# Altium PCB PIR Sensor driver v5-Cheburan.PcbDoc
Units mm, origin at the board's own origin, x right, y up, seen from the top; angles counter-clockwise.
Board outline 43.5 x 31 mm, 2 copper layers (Top Layer, Bottom Layer); 18 components, 11 nets, 45 pads, 0 vias.
Unrouted connection lines stored in the file: 2.
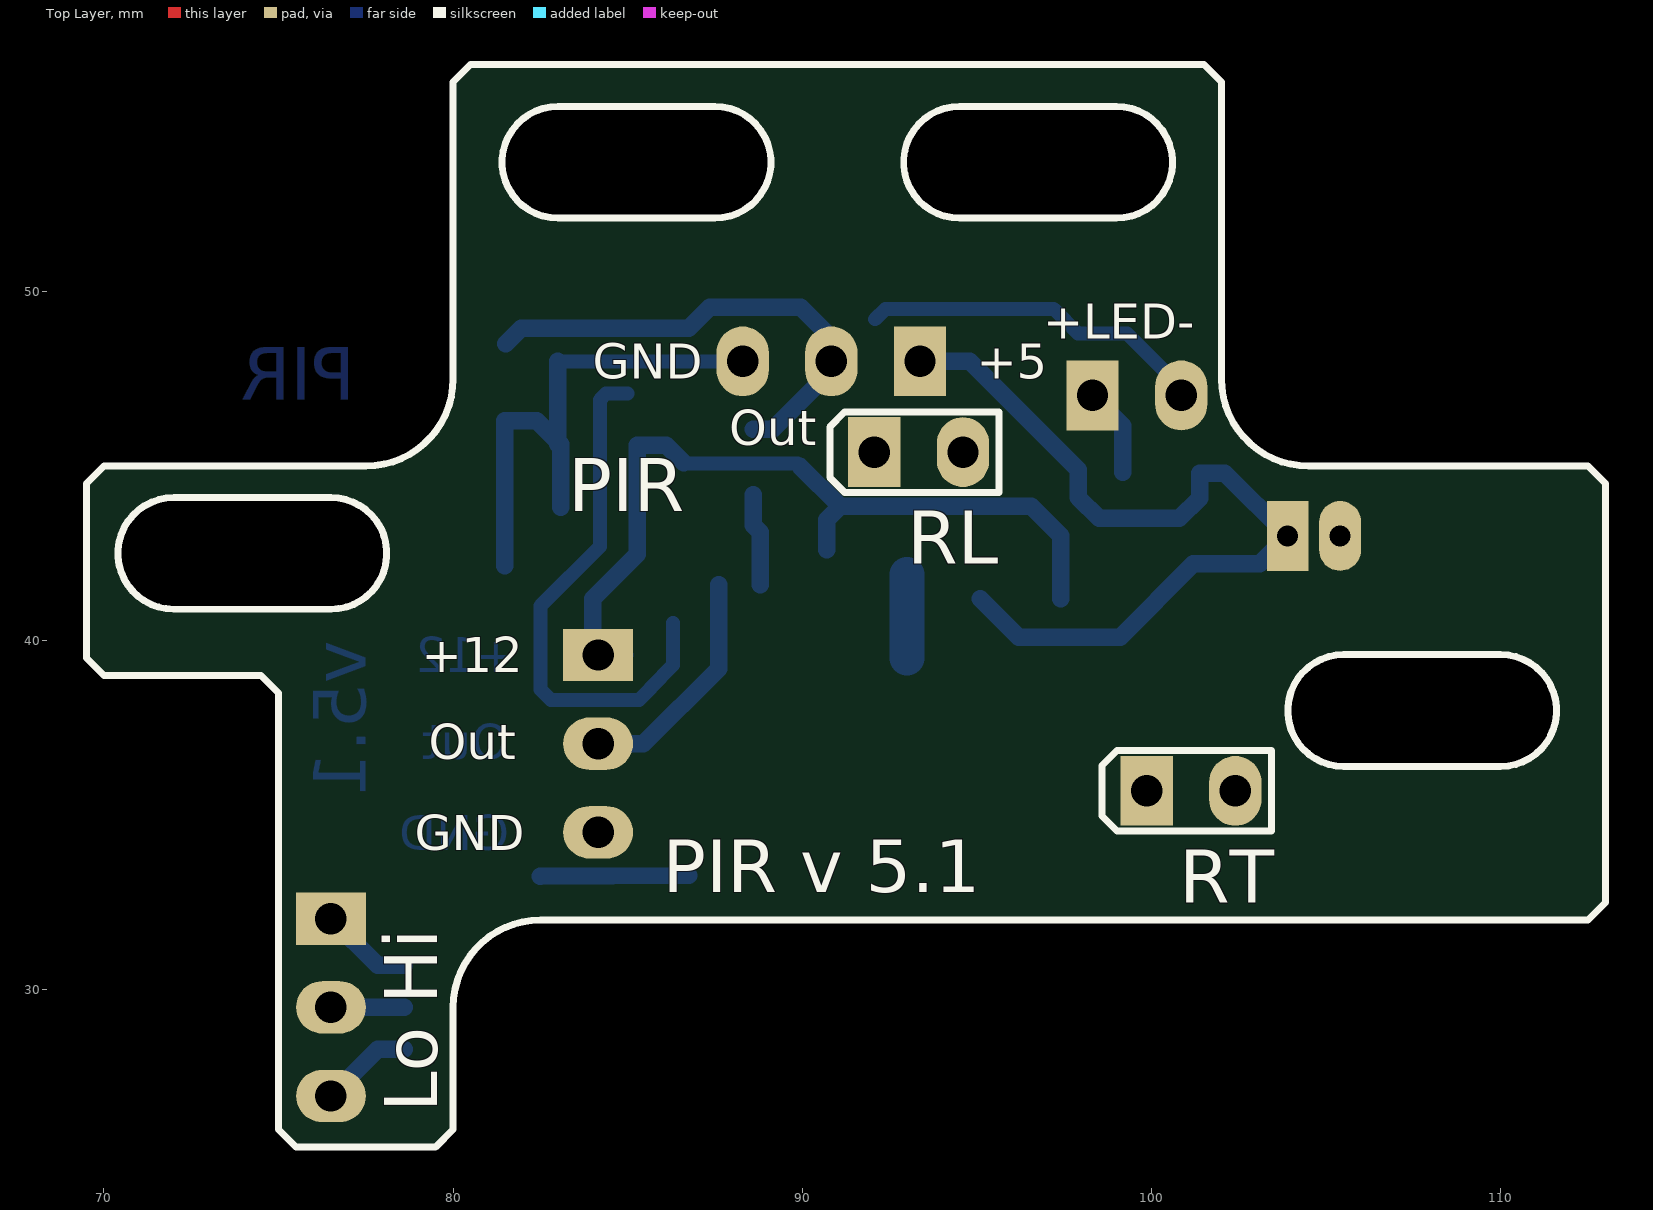
[diagram p0: Top Layer view]
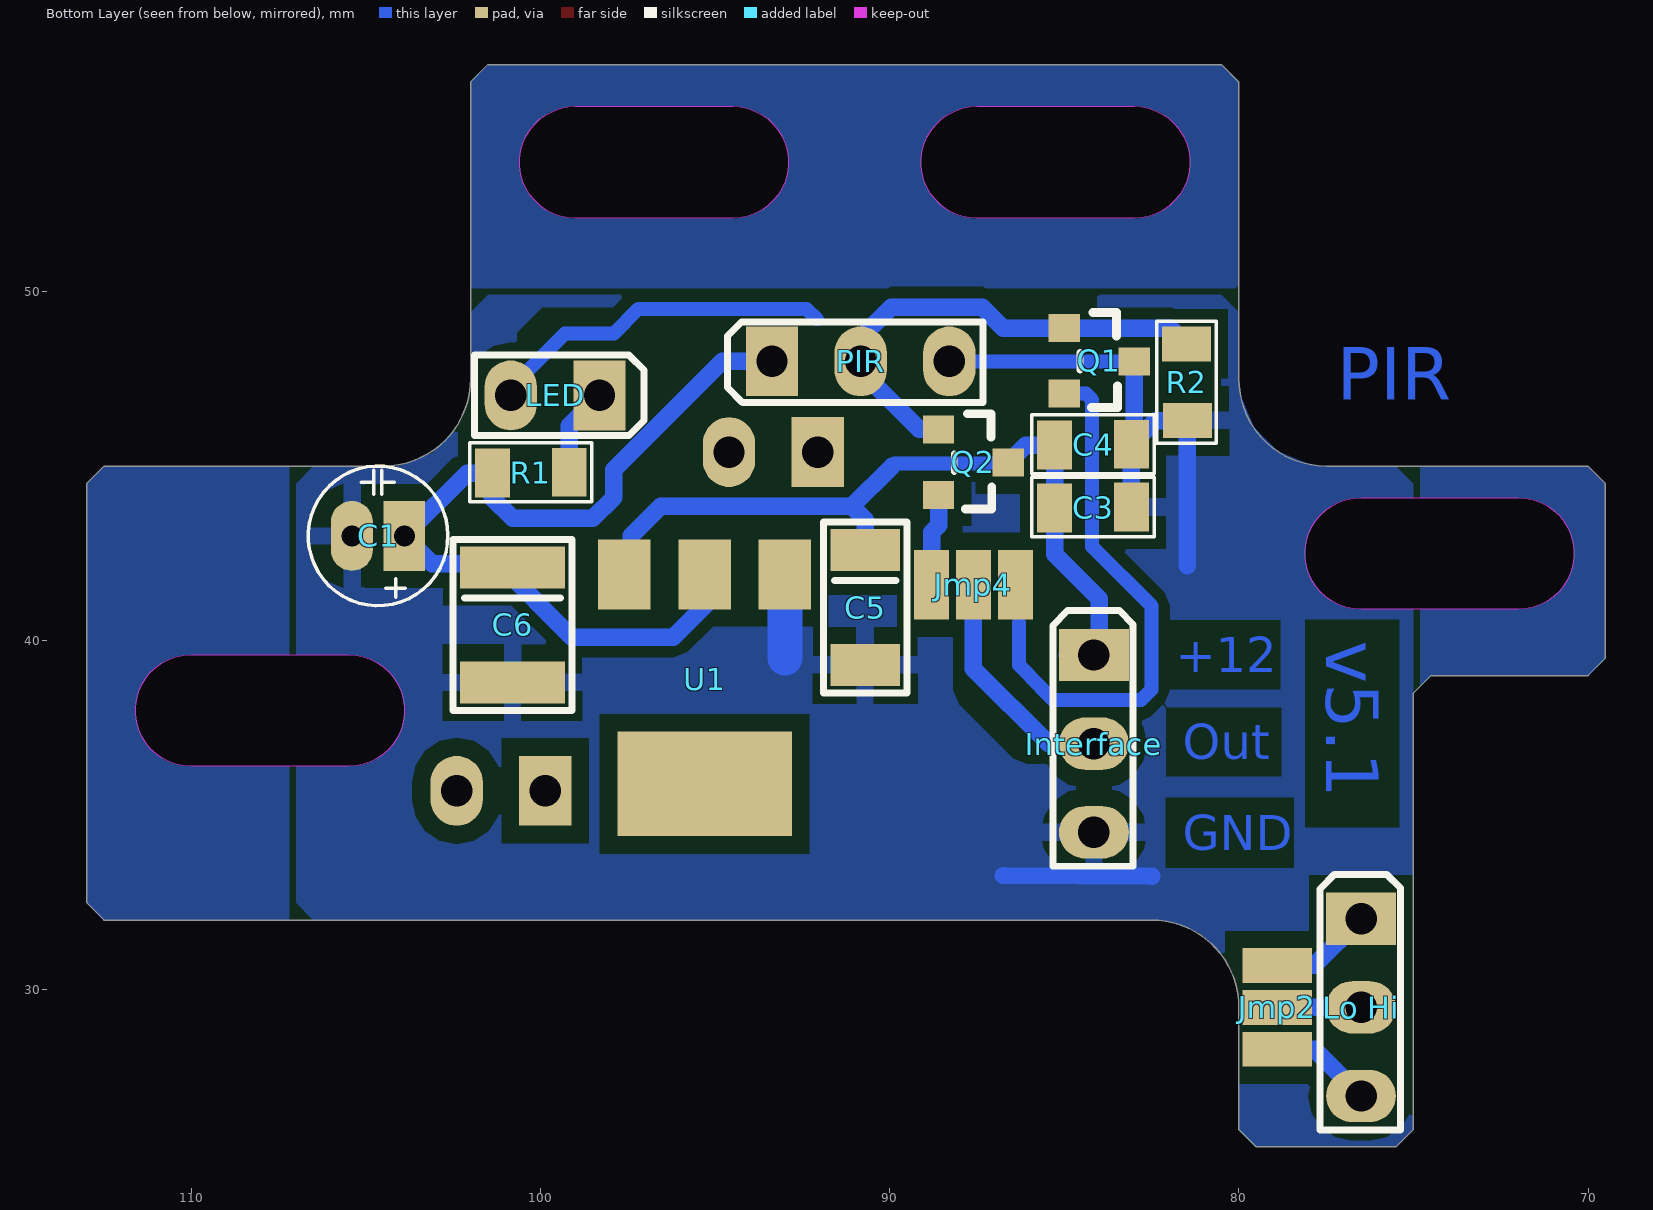
[diagram p1: Bottom Layer view, seen from below]
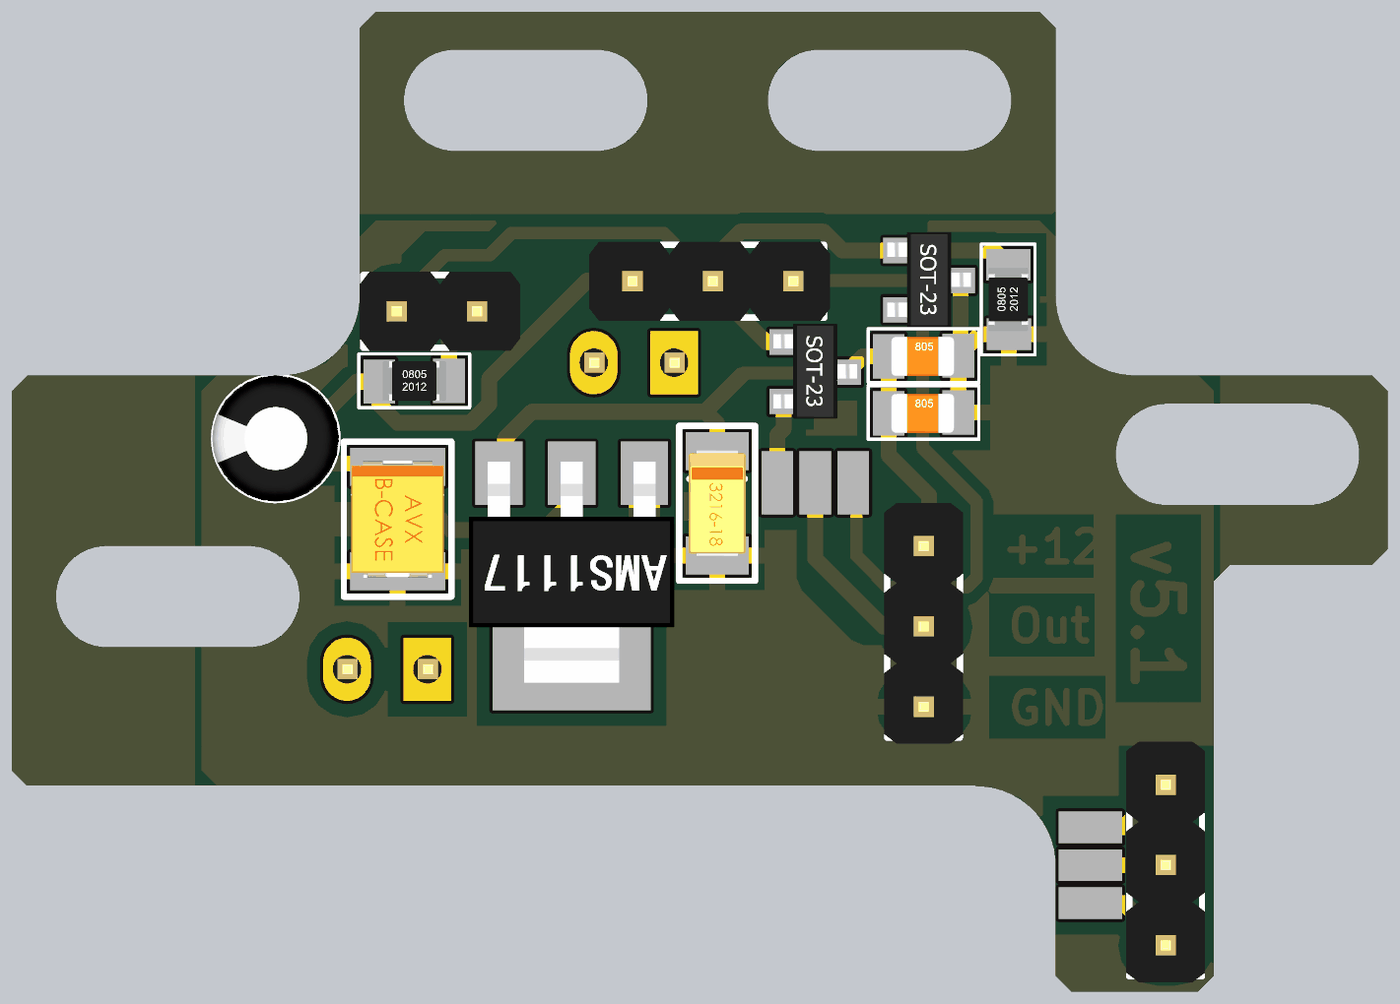
[diagram p2: 3D render of the assembled board from below, using the file's embedded part models]

## Layer stack, top to bottom
Top Solder: solder mask 0.0102, Solder Resist, Dk 3.5
Top Layer: signal copper 0.0356
Dielectric 1: dielectric 0.32, FR-4, Dk 4.8
Bottom Layer: signal copper 0.0356
Bottom Solder: solder mask 0.0102, Solder Resist, Dk 3.5

## Board outline
75,26 75,38.5 74.5,39 70,39 69.5,39.5 69.5,44.5 70,45 77.5,45 ccw(c77.5,47.5) 80,47.5 80,56 80.5,56.5 101.5,56.5 102,56 102,47.5 ccw(c104.5,47.5) 104.5,45 112.5,45 113,44.5 113,32.5 112.5,32 82.5,32 ccw(c82.5,29.5) 80,29.5 80,26 79.5,25.5 75.5,25.5
cut-out: 83,52.1 87.5,52.1 ccw(c87.5,53.7) 87.5,55.3 83,55.3 ccw(c83,53.7)
cut-out: 94.5,52.1 99,52.1 ccw(c99,53.7) 99,55.3 94.5,55.3 ccw(c94.5,53.7)
cut-out: 105.5,36.4 110,36.4 ccw(c110,38) 110,39.6 105.5,39.6 ccw(c105.5,38)
cut-out: 72,40.9 76.5,40.9 ccw(c76.5,42.5) 76.5,44.1 72,44.1 ccw(c72,42.5)

## Design rules (kind name [scope] priority, off if disabled: settings)
Clearance "Poly To All" [InPolygon vs (InPadClass('All Pads'))] p1: gap=0.5 ignorepadtopadclearanceinfootprint=FALSE except(0: Arc-Hole Track-Hole SMDPad-Hole THPad-Hole Via-Hole Fill-Hole Poly-Hole Region-Hole Text-Hole)
Clearance Jumpers [InComponent('Jmp*') vs InComponent('Jmp*')] p2: gap=0.2 ignorepadtopadclearanceinfootprint=FALSE except(0: Arc-Hole Track-Hole SMDPad-Hole THPad-Hole Via-Hole Fill-Hole Poly-Hole Region-Hole Text-Hole)
Clearance "Poly to cutout" [InPolygon vs IsRegion] p3: gap=0 ignorepadtopadclearanceinfootprint=FALSE
Clearance [All] p4: gap=0.3 ignorepadtopadclearanceinfootprint=FALSE except(0: Arc-Hole Track-Hole SMDPad-Hole THPad-Hole Via-Hole Fill-Hole Poly-Hole Region-Hole Text-Hole)
ComponentClearance [All] p1: gap=0.01 collisioncheckmode=3 verticalgap=0.2 showdistances=FALSE
Height [All] p1: minheight=0 maxheight=25 prefheight=12.7
HoleSize [All] p1: absolutevalues=TRUE maxlimit=3.2 minlimit=0.4 maxpercent=80.000 minpercent=20.000
HoleToHoleClearance [All] p1: gap=0.2 allowstackedmicrovias=TRUE
PlaneClearance [All] p1: clearance=0.5
PlaneConnect [All] p1: planeconnectstyle=Relief reliefexpansion=0.508 reliefentries=4 reliefconductorwidth=0.5 reliefairgap=0.5
PolygonConnect [All] p1: connectstyle=Relief reliefconductorwidth=0.5 reliefentries=4 polygonreliefangle="90 Angle" airgapwidth=0.5
RoutingVias [All] p1: holewidth=0.7 width=1.5 viastyle="Through Hole" minholewidth=0.4 minwidth=0.4 maxholewidth=3.2 maxwidth=7
SilkToSilkClearance [All] p1: silktosilkclearance=0.05
SilkToSolderMaskClearance [IsPad] p1: minsilkscreentomaskgap=0.2 clearancetoexposedcopper=TRUE
SolderMaskExpansion [All] p1: expansion=0.1
Width [All] p1: maxlimit=3 minlimit=0.2 preferedwidth=0.5
22 further rules are at their usual default settings.

## Components (designator, comment, footprint, x,y, rotation, side; value= is the part's Value field where it differs from the comment)
C1 "100mF 10V" "Cap E p1.5mm D4xH8 (2p)" 103.9,43 r0 bottom
C3 "0.1uF" "SMD 0805 (2012)" 85.2,43.8 r180 bottom
C4 "0.01uF" "SMD 0805 (2012)" 85.2,45.6 r180 bottom
C5 "10uF" "SMD 1206 Tantal (3216)" 90.7,42.6 r270 bottom
C6 "22uF" "SMD 3528 Tantal (1210)" 100.8,42.1 r270 bottom
Interface "Interface" "Line 2.54 X 3" 84.15,39.59 r180 bottom
Jmp2 "Jumper_3pos" "Jumper 3pos" 78.9,30.7 r270 bottom
Jmp4 "Jumper_3pos" "Jumper 3pos" 88.8,41.6 r180 bottom
LED "IR LED (AlarmIndicator)" "Line 2.54 x 2" 98.31,47.025 r270 bottom
"Lo Hi" "HiLo Switch" "Line 2.54 X 3" 76.5,32.04 r180 bottom
PIR "PIR Sensor" "Line 2.54 X 3" 93.37,48 r90 bottom
Q1 "BSS138" SOT-23 85,48.95 r270 bottom
Q2 "BC817-40" SOT-23 88.6,46.05 r270 bottom
R1 "1kOm" "SMD 0805 (2012)" 101.3,44.8 r180 bottom
R2 "10kOm" "SMD 0805 (2012)" 81.475,46.375 r90 bottom
RL "RL" "Line 2.54 x 2" 92.06,45.4 r90 top
RT "RT" "Line 2.54 x 2" 99.86,35.7 r90 top
U1 "AMS1117 - 5V" "SOT-223-3 (AMS)" 95.3,34.9 r0 bottom

## Footprints (in the part's own frame and the unit in brackets; to place one, negate y for a bottom-side part, rotate by r counter-clockwise, add the part's x,y. Pads: shape width x height; smd on the part's side, far side on the other; paste and mask are expansions set on the pad)
"Cap E p1.5mm D4xH8 (2p)" [mm] "D 4mm; H 8mm"
  rect 1.2x2 hole 0.6: 1(0,0)
  oval 1.2x2 hole 0.6: 2(1.5,0)
  silkscreen extent -1.25,-2 2.75,2, body extent -1.25,-2 2.74,2, height 7.31
"Jumper 3pos" [mm]
  rect 1x2 smd: 1(0,0) 2(1.2,0) 3(2.4,0)
"Line 2.54 x 2" [mm]
  rect 2x1.5 hole 0.9: 1(0,0)
  oval 2x1.5 hole 0.9: 2(0,-2.54)
  silkscreen extent -1.15,-3.57 1.15,1.28, body extent -1.25,-3.69 1.25,1.39, height 8.3
"Line 2.54 X 3" [mm]
  rect 2x1.5 hole 0.9: 1(0,0)
  oval 2x1.5 hole 0.9: 2(0,-2.54) 3(0,-5.08)
  silkscreen extent -1.17,-6.05 1.12,1.27, body extent -1.27,-6.25 1.22,1.37, height 8.2
"SMD 0805 (2012)" [mm]
  rect 1x1.4 smd: 1(-0.075,0) 2(2.125,0.025)
  silkscreen extent -0.72,-0.82 2.78,0.87, body extent 0,-0.62 2,0.63, height 0.78
"SMD 1206 Tantal (3216)" [mm]
  rect 1.2x2 smd: GND(3.3,0) VCC(0,0)
  silkscreen extent -0.8,-1.2 4.1,1.2, body extent -0.05,-0.9 3.35,0.9, height 1.8
"SMD 3528 Tantal (1210)" [mm]
  rect 1.2x3 smd: GND(3.3,0) VCC(0,0)
  silkscreen extent -0.8,-1.7 4.1,1.7, body extent -0.2,-1.46 3.5,1.47, height 2.03
SOT-23 [mm]
  rect 0.8x0.9 smd: 1(0,0) 2(1.875,0) 3(0.95,2)
  silkscreen extent -0.45,0.45 2.27,1.53, body extent -0.57,-0.32 2.43,2.32, height 1.08
"SOT-223-3 (AMS)" [mm]
  rect 1.5x2 smd: 1(-2.3,-7) 2(0,-7) 3(2.3,-7)
  rect 5x3 smd: 2(0,-1)
  body extent -3.25,-7.37 3.25,-0.38, height 1.85

## Part data
C1: library part "Cap E 100mF x 10V", "Capacitor"
C3 C4: library part "Cap SMD 0402-1812", "Capacitor"
C5 C6: library part "Cap Tantal", "Capacitor"
Interface "Lo Hi" PIR: library part PLS-3, "Vert, Sgl line, Male"
LED RL RT: library part PLS-2, "Vert, Sgl line, Male"
Q1: "N-Channel 50V - 0.7-1? - 0.22A", I d - Drain current (continuous) at TC = 25°C="0.22 A", I d - Drain current (continuous) at TC = 100°C="50 A", Datasheet=http://tec.org.ru/board/0-0-0-511-20, Monufacturer=Farchild, Name=BSS138, RDS=<6Om, V DSS (v)=60
Q2: "NPN 45 V, 500 mA NPN general-purpose transistor", Name=BC817-40, type="45 V, 500 mA NPN general-purpose transistors", url=http://lib.chipdip.ru/156/DOC000156781.pdf
R1 R2: library part "Res All Types"
U1: library part AMS1117_FIX, "Voltage Regulator SOT-223-3", Capacitors="In: 10mF; Out: 22mF", Case=SOT-223, Max Voltage In (V)=15, Dropuot=1-1.3V, Dtatsheet=https://lib.chipdip.ru/029/DOC001029248.pdf, I output (A)=1, Name="AMS1117 1.5 / 1.8 / 2.5 / 2.85 / 3.3 / 5.0", t=-40...+125°C, V Out="1.5 / 1.8 / 2.5 / 2.85 / 3.3 / 5.0"

## Nets (pads, with @x,y where several pads share a name; then routed paths per layer and width w, separated by ;. In a path a pad name is that pad's centre, name@x,y a point inside that pad or via, vN(x,y) a via of type N, cw(c..) or ccw(c..) an arc to the next point about the centre after c; other vN are vias at no path point)
+5V: C1.1 C6.VCC PIR.1 R1.1 U1.2 | length 25
  Bottom Layer w0.5: PIR.1 94.8,48 97.9,44.9 97.9,44.1 98.5,43.5 100.8,43.5 101.375,44.075 R1.1 102.1,44.8 C1.1 103.1,42.2 101.2,42.2 99.1,40.1 96.2,40.1 U1.2@95.1,41.2
+12V: C3.1 C4.1 C5.VCC Interface.1 Q2.3 U1.3 | length 23.7
  Bottom Layer w0.4: Q2.3 86.625,45.075 89.857,45.075 89.932,45
  Bottom Layer w0.5: Interface.1@84,39.59 84,41.2 85.275,42.475 C3.1 C4.1 86.1,45.6 Q2.3 ; Interface.1 Interface.1@84.91,39.59 ; 89.932,45 91.082,43.85 ; C5.VCC 90.7,43.468 91.082,43.85 ; U1.3@97.4,41.2 97.4,43 96.55,43.85 91.082,43.85
"ALARM OUT": Interface.2 Jmp4.2 | length 6.7
  Bottom Layer w0.5: Interface.2 85.45,37.05 87.6,39.2 Jmp4.2
GND: C1.2 C3.2 C4.2 C5.GND C6.GND Interface.3 PIR.3 Q1.3 R2.1 U1.1 | length 22.1
  Bottom Layer w0.4: Q1.3 PIR.3
  Bottom Layer w0.5: 81.475,42.15 R2.1 82.4,46.3 C4.2@83,45.7 ; 82.5,33.26 86.75,33.275 ; C4.2@83,45.625 C4.2@83,45.7 ; Q1.3 C4.2@83,45.7 ; C3.2 C4.2 C4.2@83,45.7
  Bottom Layer w1: 93,39.5 U1.1
NetJmp2_1: "Lo Hi.1" Jmp2.1 | length 2.7
  Bottom Layer w0.5: 76.5,32.04 77.84,30.7 Jmp2.1@78.6,30.7
NetJmp2_2: "Lo Hi.2" Jmp2.2 | length 2.1
  Bottom Layer w0.5: 76.5,29.5 Jmp2.2@78.6,29.5
NetJmp2_3: "Lo Hi.3" Jmp2.3 | length 2.7
  Bottom Layer w0.5: 76.5,26.96 77.84,28.3 Jmp2.3@78.6,28.3
NetJmp4_1: Jmp4.1 Q2.2 | length 2.7
  Bottom Layer w0.5: Q2.2 88.6,43.3 88.8,43.1 Jmp4.1
NetLED_1: LED.1 R1.2 | length 3
  Bottom Layer w0.5: LED.1@97.992,47.108 LED.1@98.392,47.108 ; LED.1 99.175,46.16 R1.2
"SENSOR OUT": PIR.2 Q1.1 Q2.1 R2.2 | length 14
  Bottom Layer w0.5: R2.2 81.95,48.95 Q1.1 86.75,48.95 87.35,49.55 89.95,49.55 90.83,48.67 PIR.2 90.83,47.73 89.15,46.05 Q2.1
toGnd: Jmp4.3 LED.2 Q1.2 | length 25.3
  Bottom Layer w0.4: Q1.2 84.375,47.075 84.2,46.9 84.2,42.7 82.5,41 82.5,38.6 82.8,38.3 85.317,38.3 85.65,38.633 85.65,38.65 86.3,39.3 86.3,40.5 ; 92.08,49.205 92.375,49.5 97.2,49.5 97.9,48.8 99.3,48.8 LED.2@100.9,47.2
pads on no net: RL.1 RL.2 RT.1 RT.2

## Polygon pours and split planes (outlines as drawn)
GND on Bottom Layer "Bottom Layer-No Net" (solid, pour order 0): 74.5,39 75,38.5 75,26 75.5,25.5 79.5,25.5 80,26 80,29.6 cw(c82.402,29.6) 82.5,32 112.5,32 113,32.5 113,42 113,44.5 112.5,45 104.5,45 cw(c104.395,47.395) 102,47.5 102,56 101.5,56.5 80.5,56.5 80,56 80,47.5 cw(c77.5,47.5) 77.5,45 70,45 69.5,44.5 69.5,39.5 70,39

## Other copper
Top Layer:
  text ".Layer_Name" at 97.675,59.5 h1
Bottom Layer:
  pour cut-out: 75.5,45 75,44.5 75,38.5 74.8,38.7 74.8,45
  pour cut-out: 102,49.4 101.5,49.9 80.5,49.9 80,49.4 80,50.1 102,50.1
  pour cut-out: 107,44.5 107,32.5 106.5,32 107.2,32 107.2,45 106.5,45
  pour cut-out: 85.925,47.075 86.8,46.2 87.9,45 87.9,43 89.6,41.3 96.2,41.3 101.725,41.3 101.725,44.725 100.675,45.775 100.675,48.825 99.95,49.55 87.05,49.55 86.45,48.95 85,48.95 80.5,48.95 80.5,47.075
  text ".Layer_Name" at 82.2,59.2 h1
  text "PIR" at 77.2,46.9 h1.5
  text "v5.1" at 77.5,40 h1.5 r90
  text "+12" at 81.8,39.1 h1
  text "Out" at 81.6,36.6 h1
  text "GND" at 81.6,34 h1

## Silkscreen, mask and mechanical layers (free items; w line width, h text height)
Top Overlay:
  lines w0.2: 69.5,39.5 70,39 74.5,39 75,38.5 75,26 75.5,25.5 79.5,25.5 80,26 80,29.5 cw(c82.5,29.5) 82.5,32 112.5,32 113,32.5 113,44.5 112.5,45 104.5,45 cw(c104.5,47.5) 102,47.5 102,56 101.5,56.5 80.5,56.5 80,56 80,47.5 cw(c77.5,47.5) 77.5,45 70,45 69.5,44.5 69.5,39.5 ; 72,40.9 cw(c72,42.5) 72,44.1 76.5,44.1 cw(c76.5,42.5) 76.5,40.9 72,40.9 ; 83,52.1 cw(c83,53.7) 83,55.3 87.5,55.3 cw(c87.5,53.7) 87.5,52.1 83,52.1 ; 94.5,52.1 cw(c94.5,53.7) 94.5,55.3 99,55.3 cw(c99,53.7) 99,52.1 94.5,52.1 ; 105.5,36.4 cw(c105.5,38) 105.5,39.6 110,39.6 cw(c110,38) 110,36.4 105.5,36.4
  text ".Layer_Name" at 97.675,59.5 h1
  text "+LED-" at 96.9,48.65 h1
  text "GND" at 84,47.5 h1
  text "+5" at 95,47.5 h1
  text "Out" at 87.9,45.6 h1
  text "PIR" at 83.3,43.7 h1.52
  text "+12" at 79.1,39.1 h1
  text "Out" at 79.3,36.6 h1
  text "GND" at 78.9,34 h1
  text "PIR v 5.1" at 86,32.8 h1.5
Bottom Overlay:
  text ".Layer_Name" at 82.2,59.2 h1
Top Solder:
  text ".Layer_Name" at 97.675,59.5 h1
Bottom Solder:
  text ".Layer_Name" at 82.2,59.2 h1
Mechanical 2:
  text "32-38 x 19 mm" at 70.4,61.25 h1
  text "V 5.1" at 91.4,59.8 h2
  text "PIR HC-SR501" at 70.375,59.475 h1
  text ".Pcb_File_Name_No_Path" at 70.325,57.425 h1
Mechanical 3:
  text "32-38 x 19 mm" at 113,61.25 h1
  text "V 5.1" at 92.1,59.8 h2
  text "PIR HC-SR501" at 112.975,59.475 h1
  text ".Pcb_File_Name_No_Path" at 112.925,57.425 h1
Drill Drawing:
  text ".Legend" at 70.4,63.4 h1

## Dimensions
107.5,29.5 to 113,29.5 on Mechanical 3
70,25.5 to 75,25 on Mechanical 3
70,25.5 to 75,25 on Mechanical 2
107.5,29.5 to 113,29.5 on Mechanical 2
75,56.5 to 75,50 on Mechanical 2
70,25 to 113,27.5 on Mechanical 3
75,56.5 to 70,25.5 on Mechanical 3
75,56.5 to 70,25.5 on Mechanical 2
70,25 to 113,27.5 on Mechanical 2